# Altium PCB KTIR.PcbDoc
Units mil, origin at the board's own origin, x right, y up, seen from the top; angles counter-clockwise.
Board outline 375 x 215 mil, 2 copper layers (Top Layer, Bottom Layer); 3 components, 4 nets, 11 pads, 0 vias.
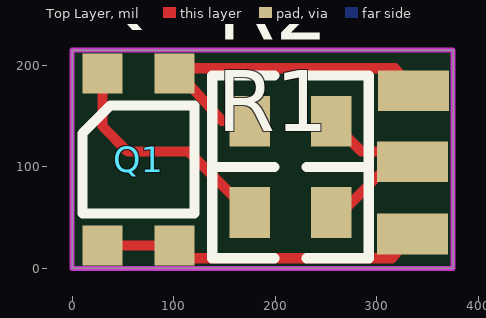
[diagram p0: Top Layer view]
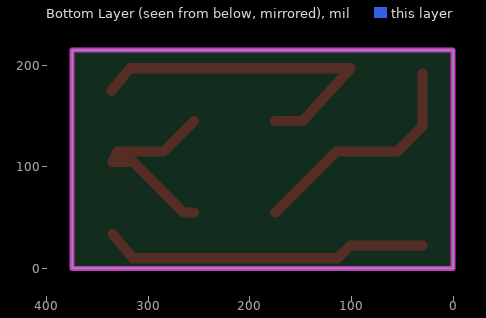
[diagram p1: Bottom Layer view, seen from below]

## Layer stack, top to bottom
Top Layer: signal copper 1.4
Dielectric: dielectric 12.6, FR-4, Dk 4.8
Bottom Layer: signal copper 1.4

## Board outline
0,215 0,0 375,0 375,215 0,215

## Design rules (kind name [scope] priority, off if disabled: settings)
Clearance [All] p1: gap=10
PolygonConnect [All] p1: connectstyle=Relief reliefconductorwidth=10 reliefentries=4 polygonreliefangle="90 Angle" airgapwidth=10
RoomDefinition KTIR [InComponentClass('KTIR')] p1: confinementstyle=ConfineIn formatcopy=TRUE lockcomponents=FALSE outline 0,0 375,0 375,215 0,215
RoutingVias [All] p1: holewidth=28 width=50 viastyle="Through Hole" minholewidth=28 minwidth=50 maxholewidth=28 maxwidth=50
SilkscreenOverComponentPads [All] p1: minsilkscreentomaskgap=10
SolderMaskExpansion [All] p1: expansion=4
Width [All] p1: maxlimit=10 minlimit=10 preferedwidth=10
27 further rules are at their usual default settings.

## Components (designator, comment, footprint, x,y, rotation, side; value= is the part's Value field where it differs from the comment)
Q1 "KTIR" KTIR0711S 30,192 r0 top
R1 "100" "0805 RES" 255,55 r90 top
R2 "22k" "0805 RES" 255,145 r90 top

## Footprints (in the part's own frame and the unit in brackets; to place one, negate y for a bottom-side part, rotate by r counter-clockwise, add the part's x,y. Pads: shape width x height; smd on the part's side, far side on the other; paste and mask are expansions set on the pad)
"0805 RES" [mil]
  rect 50x40 smd: 1(0,0) 2(0,80)
  silkscreen extent -45,-37 45,117, body extent -25,0 25,79, height 31
KTIR0711S [mm]
  rect 1x1 smd: 1(0,0) 2(1.8,0) 3(1.8,-4.3) 4(0,-4.3)
  silkscreen extent -0.5,-3.5 2.3,-0.8, body extent -0.5,-3.5 2.3,-0.8, height 1.5

## Part data
R1 R2: library part R

## Free pads (board coordinates)
  rect 70x40 smd: 8(335.93,175) 9(335,105) 10(335,34)

## Nets (pads, with @x,y where several pads share a name; then routed paths per layer and width w, separated by ;. In a path a pad name is that pad's centre, name@x,y a point inside that pad or via, vN(x,y) a via of type N, cw(c..) or ccw(c..) an arc to the next point about the centre after c; other vN are vias at no path point)
GND: pad.10 Q1.3 Q1.4 | length 321.5
  Top Layer w10: Q1.4 Q1.3 113.57,10 315,10 pad.10
KTIR: pad.8 Q1.2 R2.2 | length 342.7
  Top Layer w10: R2.2 147.87,145 100.87,197 318,197 pad.8
NetQ1_1: Q1.1 R1.2 | length 232.2
  Top Layer w10: Q1.1 30,140 55,115 115,115 R1.2
VCC: pad.9 R1.1 R2.1 | length 199.3
  Top Layer w10: R1.1 265,55 315,105 pad.9 330,115 285,115 R2.1

## Keep-outs
Keep-Out Layer:
  lines w5: 0,0 375,0 ; 0,0 0,215 ; 0,0 0,215 ; 0,0 375,0 ; 0,215 375,215 ; 0,215 375,215 ; 375,0 375,215 ; 375,0 375,215